# EAGLE board mtc2-n9151-breakout (EAGLE 7.5.0)
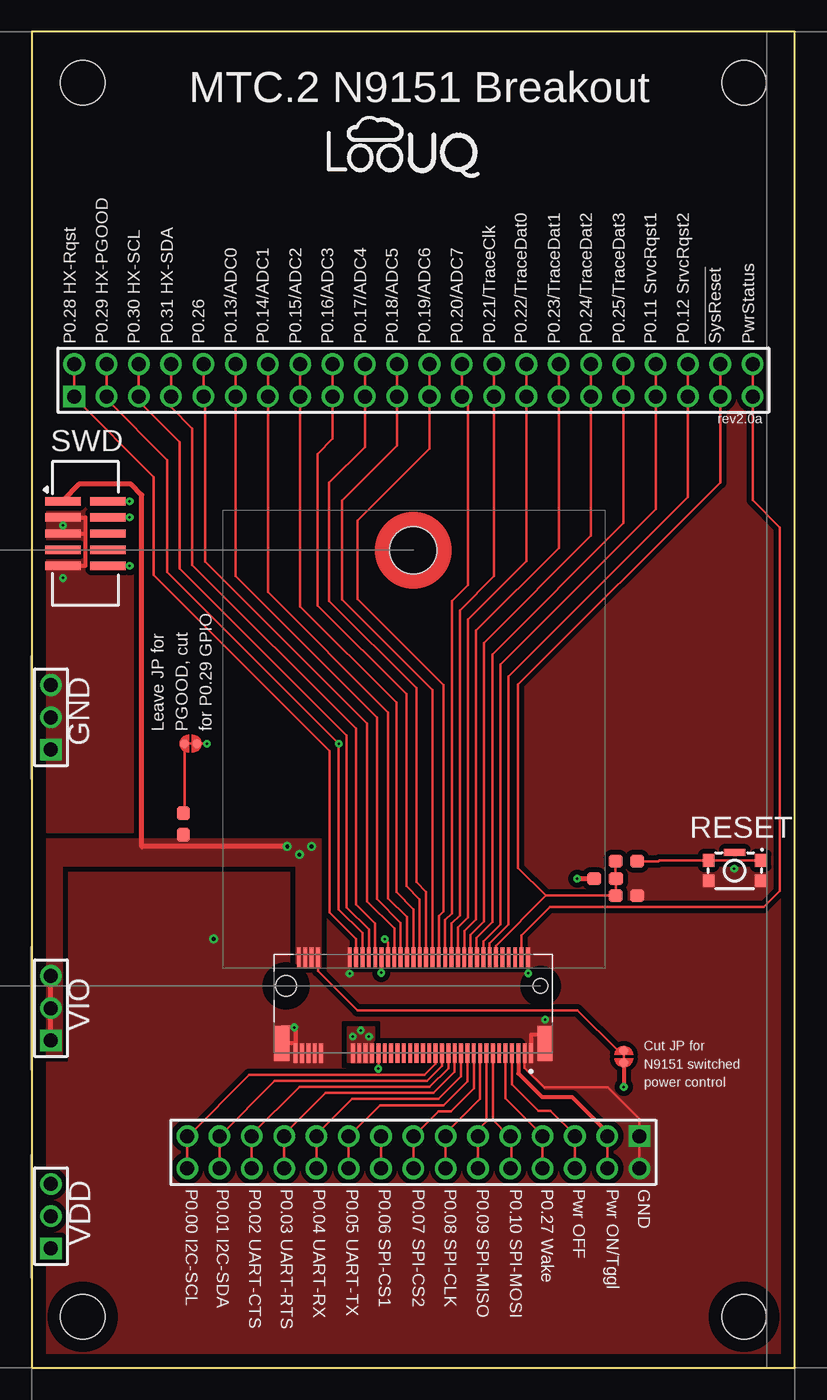
[diagram p0: board, top side]
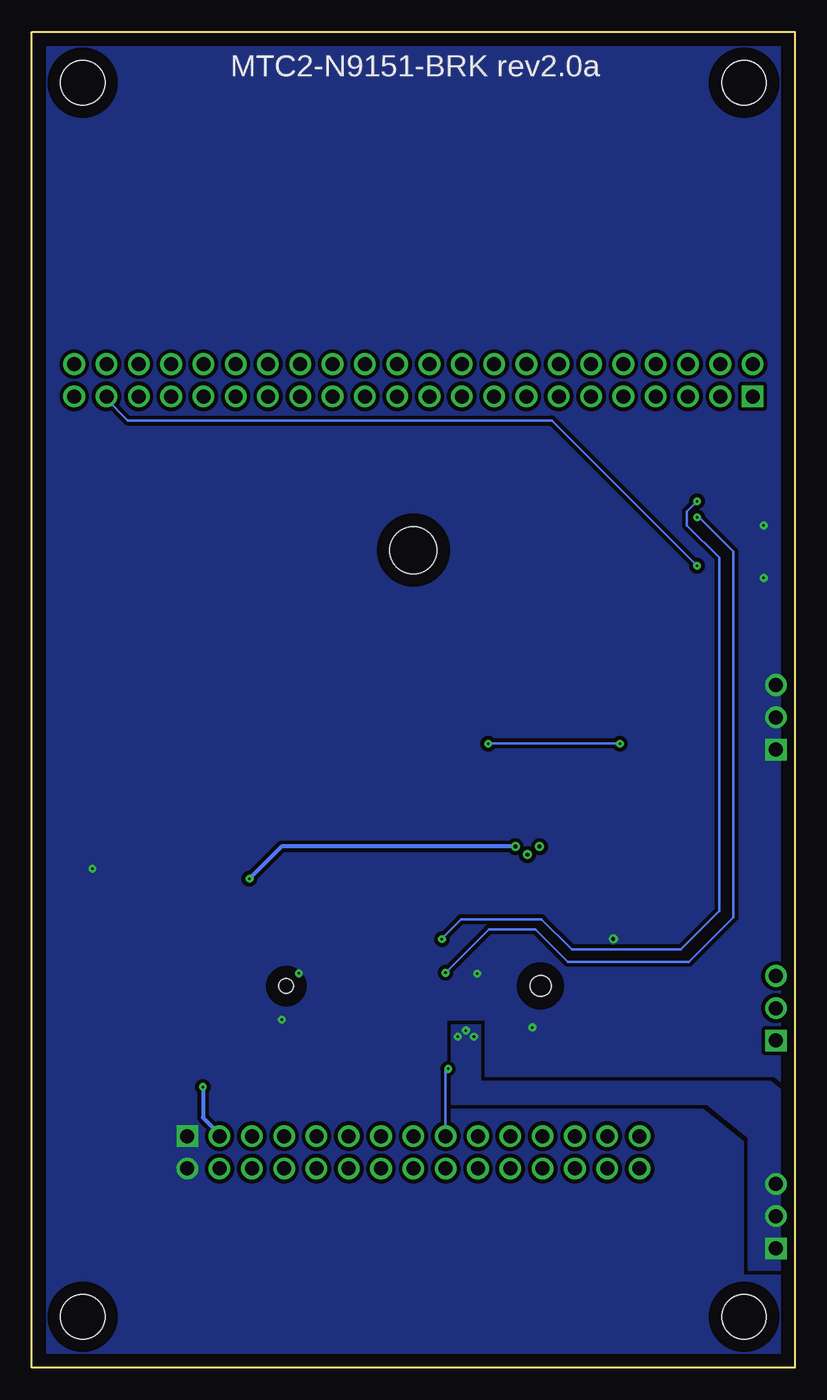
[diagram p1: board, bottom side, seen from below]

Size 60 x 105 mm. Coordinates in mm from the lower left corner, seen from the top.
Outline: 0,0 60,0 60,105 0,105 0,0
Copper layers (1*16): Top 0.035mm / dielectric 1.5mm / Bottom 0.035mm
Design rules "default *": minimum track width 10mil, minimum drill 0.61mm, track to track 8mil, track to pad 8mil, pad to pad 8mil, via to via 8mil, smd to smd 8mil, copper to edge 40mil, drill to drill 8mil, minimum pad ring 0mil, minimum via ring 8mil, stop-mask expansion 2mil, vias tented up to drill 12mil, thermal gap 10mil
Net classes: 0 Default: width 0.18 mm, clearance 0.2 mm, clearance 0.2 mm to class 1, clearance 0.2 mm to class 2, clearance 0.2 mm to class 3; 1 Power: width 0.4 mm, clearance 0.2 mm, clearance 0.2 mm to class 0, clearance 0.2 mm to class 2, clearance 0.2 mm to class 3; 2 NetClass2: width 0.3 mm, clearance 0.2 mm, clearance 0.2 mm to class 0, clearance 0.2 mm to class 1, clearance 0.2 mm to class 3; 3 Power-HI: width 0.6 mm, clearance 0.2 mm, clearance 0.2 mm to class 0, clearance 0.2 mm to class 1, clearance 0.2 mm to class 2
Holes 3.5 mm at 4,4 56,4 4,101 56,101
Holes 2 mm at 127.5,102.25 -7.25,102.5 127.5,2.5 -7.5,2.5

## Footprints (pad centres in the part's own frame; a part is rotated, then mirrored left to right if it is on the bottom)
CAP_0603 = smd 1.1 x 1: 1 -0.85,0; 2 0.85,0
Fiducial = smd 0.75 x 0.75: FID1 0,0
CnCTech_3220-10-0300-00-TR = smd 0.65 x 2.77: 1 -2.54,-1.765; 2 -2.54,1.765; 3 -1.27,-1.765; 4 -1.27,1.765; 5 0,-1.765; 6 0,1.765; 7 1.27,-1.765; 8 1.27,1.765; 9 2.54,-1.765; 10 2.54,1.765
HDR-1x3T/2.54/7x2 = drill 1.1 pad 1.7 square: 1 -2.54,0 | drill 1.1 pad 1.7: 2 0,0; 3 2.54,0
HDR-1x3T/2.54/7x2_J4 = drill 1.1 pad 1.7 square: 1 -2.54,0 | drill 1.1 pad 1.7: 2 0,0; 3 2.54,0
TE_1-2199230-6 = smd 0.3 x 1.55: 1 -9.25,5.275; 2 -9,-2.275; 3 -8.75,5.275; 4 -8.5,-2.275; 5 -8.25,5.275; 6 -8,-2.275; 7 -7.75,5.275; 8 -7.5,-2.275; 9 -7.25,5.275; 10 -7,-2.275; 11 -6.75,5.275; 12 -6.5,-2.275; 13 -6.25,5.275; 14 -6,-2.275; 15 -5.75,5.275; 16 -5.5,-2.275; 17 -5.25,5.275; 18 -5,-2.275; 19 -4.75,5.275; 20 -4.5,-2.275; 21 -4.25,5.275; 22 -4,-2.275; 23 -3.75,5.275; 24 -3.5,-2.275; 25 -3.25,5.275; 26 -3,-2.275; 27 -2.75,5.275; 28 -2.5,-2.275; 29 -2.25,5.275; 30 -2,-2.275; 31 -1.75,5.275; 32 -1.5,-2.275; 33 -1.25,5.275; 34 -1,-2.275; 35 -0.75,5.275; 36 -0.5,-2.275; 37 -0.25,5.275; 38 0,-2.275; 39 0.25,5.275; 40 0.5,-2.275; 41 0.75,5.275; 42 1,-2.275; 43 1.25,5.275; 44 1.5,-2.275; 45 1.75,5.275; 46 2,-2.275; 47 2.25,5.275; 48 2.5,-2.275; 49 2.75,5.275; 50 3,-2.275; 51 3.25,5.275; 52 3.5,-2.275; 53 3.75,5.275; 54 4,-2.275; 55 4.25,5.275; 56 4.5,-2.275; 57 4.75,5.275; 58 5,-2.275; 67 7.25,5.275; 68 7.5,-2.275; 69 7.75,5.275; 70 8,-2.275; 71 8.25,5.275; 72 8.5,-2.275; 73 8.75,5.275; 74 9,-2.275; 75 9.25,5.275 | smd 1.2 x 2.75: S1 -10.35,4.5; S2 10.35,4.5 | hole 1.15: -10,0 | hole 1.65: 10,0
HDR-2x15T/2.54x2.54/38x5 = drill 1.1 pad 1.7 square: 1 -17.78,-1.27 | drill 1.1 pad 1.7: 2 -17.78,1.27; 3 -15.24,-1.27; 4 -15.24,1.27; 5 -12.7,-1.27; 6 -12.7,1.27; 7 -10.16,-1.27; 8 -10.16,1.27; 9 -7.62,-1.27; 10 -7.62,1.27; 11 -5.08,-1.27; 12 -5.08,1.27; 13 -2.54,-1.27; 14 -2.54,1.27; 15 0,-1.27; 16 0,1.27; 17 2.54,-1.27; 18 2.54,1.27; 19 5.08,-1.27; 20 5.08,1.27; 21 7.62,-1.27; 22 7.62,1.27; 23 10.16,-1.27; 24 10.16,1.27; 25 12.7,-1.27; 26 12.7,1.27; 27 15.24,-1.27; 28 15.24,1.27; 29 17.78,-1.27; 30 17.78,1.27
HDR-2x22T/2.54x2.54/56x5 = drill 1.1 pad 1.7 square: 1 -26.67,-1.27 | drill 1.1 pad 1.7: 2 -26.67,1.27; 3 -24.13,-1.27; 4 -24.13,1.27; 5 -21.59,-1.27; 6 -21.59,1.27; 7 -19.05,-1.27; 8 -19.05,1.27; 9 -16.51,-1.27; 10 -16.51,1.27; 11 -13.97,-1.27; 12 -13.97,1.27; 13 -11.43,-1.27; 14 -11.43,1.27; 15 -8.89,-1.27; 16 -8.89,1.27; 17 -6.35,-1.27; 18 -6.35,1.27; 19 -3.81,-1.27; 20 -3.81,1.27; 21 -1.27,-1.27; 22 -1.27,1.27; 23 1.27,-1.27; 24 1.27,1.27; 25 3.81,-1.27; 26 3.81,1.27; 27 6.35,-1.27; 28 6.35,1.27; 29 8.89,-1.27; 30 8.89,1.27; 31 11.43,-1.27; 32 11.43,1.27; 33 13.97,-1.27; 34 13.97,1.27; 35 16.51,-1.27; 36 16.51,1.27; 37 19.05,-1.27; 38 19.05,1.27; 39 21.59,-1.27; 40 21.59,1.27; 41 24.13,-1.27; 42 24.13,1.27; 43 26.67,-1.27; 44 26.67,1.27
Circ-Jumper-2 = smd 0.7 x 0.7: 1 -0.479,0; 2 0.484,0
Circ-Jumper-2_JP2 = smd 0.7 x 0.7: 1 -0.479,0; 2 0.484,0
m.2_standoff = hole 3.7: 0,0
RES_0603 = smd 1.1 x 1: 1 -0.85,0; 2 0.85,0
RES_0603_R2 = smd 1.1 x 1: 1 -0.85,0; 2 0.85,0
RES_0603_R10 = smd 1.1 x 1: 1 -0.85,0; 2 0.85,0
KMR-2-wG = smd 0.9 x 1: 1@ -2.05,0.4; 1@_1 2.05,0.4; 2@ 2.05,-1.2; 2@_1 -2.05,-1.2 | smd 1.7 x 0.55: S 0,1.025

## Placement (x,y rotation side)
C1  4.7uF  [CAP_0603]  46.74,37.1 180 top
FID1  FIDUCIAL  [Fiducial]  127.5,97.5 0 top  (outside the outline)
FID2  FIDUCIAL  [Fiducial]  -7.5,97.5 0 top  (outside the outline)
FID3  FIDUCIAL  [Fiducial]  127.5,7.5 0 top  (outside the outline)
FID4  FIDUCIAL  [Fiducial]  -7.5,7.5 0 top  (outside the outline)
J1  CNCTECH 3220-10-0300-00-TR  [CnCTech_3220-10-0300-00-TR]  4.22,65.56 270 top
J2  644456-3  [HDR-1x3T/2.54/7x2]  1.5,51.12 90 top
J3  644456-3  [HDR-1x3T/2.54/7x2]  1.5,11.91 90 top
J4  644456-3  [HDR-1x3T/2.54/7x2_J4]  1.5,28.26 90 top
J5  MTC.2 1-2199230-6 (N9151)  [TE_1-2199230-6]  30,30 180 top
J6  DEV_J6  [HDR-2x15T/2.54x2.54/38x5]  30,16.93 180 top
J7  DEV_J7  [HDR-2x22T/2.54x2.54/56x5]  30,77.61 0 top
JP1  CIRCJUMPER-2  [Circ-Jumper-2]  46.55,24.45 270 top
JP2  CIRCJUMPER-2  [Circ-Jumper-2_JP2]  12.48,49.05 0 top
LG1  LOOUQ LOGO  [LooUQ-6mm]  29.19,95.91 0 top
MH1  9774025151R  [m.2_standoff]  30,64.25 90 top
R1  10K  [RES_0603]  45.07,38.44 180 top
R2  330R  [RES_0603_R2]  46.74,39.8 0 top
R10  10K  [RES_0603_R10]  11.91,42.73 270 top
SW1  KMR221GLFS  [KMR-2-wG]  55.26,39.47 0 top

## Library data of the parts
C1 = common; MANUFACTURER: Samsung; MFGPARTNM: CAP CER 4.7UF 10V X5R 0603
FID1-FID4 = common
J1 = common; MANUFACTURER: CnCTech
J2-J4 = common; DATASHEET: http://datasheets.diptrace.com/con_headers/ENG_CD_644456_D2.pdf; MANUFACTURER: TE Connectivity; MOUNT: TH
J5 = common; AVAILABILITY: In Stock; CENTERLINE_PITCH: .5 mm[.0197 in]; CHECK_PRICES: https://www.snapeda.com/parts/1-2199230-6/TE+Connectivity+AMP+Connectors/view-part/?ref=eda; COMMENT: 1-2199230-6; DESCRIPTION: 67 Position Female Connector M.2 (NGFF) Mini Card Gold 0.020 (0.50mm) Black; MANUFACTURER: TE Connectivity; MF: TE Connectivity; MP: 1-2199230-6; NUMBER_OF_POSITIONS: 67; PACKAGE: None; PRICE: None; PRODUCT_TYPE: Socket; SNAPEDA_LINK: https://www.snapeda.com/parts/1-2199230-6/TE+Connectivity+AMP+Connectors/view-part/?ref=snap
J6 = common; MOUNT: TH
J7 = common; DATASHEET: http://datasheets.diptrace.com/con_headers/877582816_sd.pdf; MOUNT: TH
JP1 JP2 = common; MOUNT: TR
LG1 = common; DESCRIPTION: LooUQ logo silk; MANUFACTURER: PCB; MOUNT: SLK
MH1 = common; DATASHEET: https://www.we-online.com/components/products/datasheet/9774025151R.pdf; MANUFACTURER: Wurth
R1 = common; MANUFACTURER: Stackpole
R2 = common; MANUFACTURER: Walsin Technology
R10 = common; DESCRIPTION: RES 10K OHM 1% 1/8W 0603; MANUFACTURER: Stackpole
SW1 = common; CLASS: Switch; DATASHEET: https://www.ckswitches.com/media/1479/kmr2.pdf; DESCRIPTION: Tactile Switch SPST-NO Top Actuated Surface Mount, GndPin, 300gf; MANUFACTURER: C&K

## Nets
ND_RESETSW: R2.2 SW1.1@ SW1.1@_1
Net_GND: C1.1 J1.3 J1.5 J1.9 J2.1 J2.2 J2.3 J5.1 J5.2 J5.3 J5.58 J5.67 J5.69 J5.71 J5.73 J5.75 J5.S1 J5.S2 J6.1 J6.2 SW1.2@ SW1.2@_1
Net_SWCLK: J1.4 J5.48
Net_SWIO: J1.2 J5.46
Net_VDD: J3.1 J3.2 J3.3 J5.51 J5.53 J5.55 J5.57
Net_VIO [NetClass2]: J1.1 J4.1 J4.2 J4.3 J5.5 J5.68 J5.70 J5.72 J5.74 J6.3 J6.4 JP1.1 JP1.2 R1.2 R10.2
nSysReset: C1.2 J1.10 J5.12 J7.41 J7.42 R1.1 R2.1
P0.00_I2C-SCL: J5.31 J6.29 J6.30
P0.01_I2C-SDA: J5.29 J6.27 J6.28
P0.02_UART-CTS: J5.27 J6.25 J6.26
P0.03_UART-RTS: J5.25 J6.23 J6.24
P0.04_UART-RX: J5.23 J6.21 J6.22
P0.05_UART-TX: J5.21 J6.19 J6.20
P0.06_SPI-CS1: J5.49 J6.17 J6.18
p0.07_SPI-CS2: J5.19 J6.15 J6.16
P0.08_SPI-CLK: J5.17 J6.13 J6.14
P0.09_SPI-MISO: J5.15 J6.11 J6.12
P0.10_SPI-MOSI: J5.13 J6.9 J6.10
P0.11_SrvcRqst1: J5.16 J7.37 J7.38
P0.12_SrvcRqst2: J5.14 J7.39 J7.40
P0.13_ADC0: J5.42 J7.11 J7.12
P0.14_ADC1: J5.40 J7.13 J7.14
P0.15_ADC2: J5.38 J7.15 J7.16
P0.16_ADC3: J5.36 J7.17 J7.18
P0.17_ADC4: J5.34 J7.19 J7.20
P0.18_ADC5: J5.32 J7.21 J7.22
P0.19_ADC6: J5.30 J7.23 J7.24
P0.20_ADC7: J5.28 J7.25 J7.26
P0.21_TraceClk: J5.26 J7.27 J7.28
P0.22_TraceD0: J5.24 J7.29 J7.30
P0.23_TraceD1: J5.22 J7.31 J7.32
P0.24_TraceD2: J5.20 J7.33 J7.34
P0.25_TraceD3: J5.18 J7.35 J7.36
P0.26: J5.44 J7.9 J7.10
P0.27_WAKE: J5.9 J6.7 J6.8
P0.28_(HX-Rqst): J5.56 J7.1 J7.2
P0.29_(HX-PGOOD): J5.54 J7.3 J7.4 JP2.1 JP2.2 R10.1
P0.30_HX-SCL: J5.52 J7.5 J7.6
P0.31_HX-SDA: J5.50 J7.7 J7.8
PwrOFF: J5.7 J6.5 J6.6
PwrStatus: J5.4 J7.43 J7.44

## Tracks (layer width: path | path; a pad name or v marks a point on that pad's centre or on a via)
ND_RESETSW
  Top 0.18: SW1.1@_1 SW1.1@ | SW1.1@ | R2.2 49.28,39.8 49.35,39.87 SW1.1@
Net_GND  (via drill 0.2 pad 0.4, 0.3 pad 0.6)
  Top 0.18: J5.3 38.75,23.55 40.29,22.02 45.31,22.02 47.78,19.54 J6.1 J6.2
  Top 0.3: J5.75 20.75,25.5 | 20.75,25.5 J5.S2 19.65,26.75 v20.64,26.75 20.75,26.75 20.75,25.5 | J1.5 4.2,65.56 | 4.2,65.56 4.2,63.02 J1.9 | J1.3 4.2,66.83 4.2,65.56 | J5.S1 40.35,25.85 40.02,26.18 39.25,26.18 J5.1
  other vias: 2.45,66.2 24.98,30.97 39.02,31 2.45,62.07 14.3,33.7 55.23,39.23 40.35,27.35
  pour Top (isolate 0.4, rank 3): 0.53,0.53 59.47,0.53 59.47,104.47 0.53,104.47
  pour Bottom (isolate 0.3, rank 2): 0.53,0.53 59.47,0.53 59.47,104.47 0.53,104.47
Net_SWCLK  (via drill 0.2 pad 0.4)
  Top 0.18: J5.48 v27.48,31.04 | J1.4 | J1.4 v7.69,66.83
  Bottom 0.18: v7.69,66.83 7.53,66.83 4.84,64.14 4.84,35.41 8.34,31.91 17.86,31.91 20.4,34.45 24.06,34.45 v27.48,31.04
Net_SWIO  (via drill 0.2 pad 0.4)
  Top 0.18: J1.2 v7.69,68.1 | v27.76,33.69 28,33.45 J5.46
  Bottom 0.18: v7.69,68.1 8.49,67.31 8.49,66.2 5.95,63.66 5.95,35.89 8.97,32.86 17.54,32.86 19.92,35.24 26.27,35.24 27.76,33.76 v27.76,33.69
Net_VDD  (via drill 0.2 pad 0.4)
  other vias: 25.24,26.03 26.51,26.03 25.87,26.51
  pour Top (isolate 0.15, rank 2, no thermals): 25.15,24.01 26.87,24 26.88,25.53 25.15,25.53
  pour Top (isolate 0.25, rank 2, no thermals): 26.93,24.02 26.93,26.77 24.81,26.77 24.81,24.02
  pour Bottom (isolate 0.25, no thermals): 24.74,26.94 27.02,26.94 27.02,20.69 6.89,20.69 3.68,18.12 3.68,7.67 0.6,7.67 0.61,21.4 1.92,22.49 24.74,22.49
Net_VIO  (via drill 0.2 pad 0.4, 0.3 pad 0.6)
  Top 0.18: J6.3 J6.4 | JP1.2 JP1.1 46.08,24.93 42.91,28.1 25.59,28.1 22.5,31.19 J5.68 | JP1.2 | JP1.2
  Top 0.3: J5.5 38.25,23.13 40.11,21.27 42.46,21.27 45.24,18.5 J6.3 | JP1.2 v46.55,22.07
  Top 0.4: J4.1 J4.2 | J4.2 | J4.2 J4.3 | J4.3 | v20.08,40.96 8.64,40.96 8.64,68.6 7.81,69.43 3.7,69.43 2.45,68.19 J1.1 | v42.88,38.44 R1.2 | R1.2
  Bottom 0.3: v46.55,22.07 46.55,19.65 45.24,18.34 J6.3 | v21.99,40.96 40.36,40.96 v42.88,38.44
  other vias: 21.04,40.32
  pour Top (isolate 0.25, rank 2, no thermals): 0.6,24.5 0.6,41.54 22.73,41.54 22.73,31.48 20.77,31.48 20.77,39.42 2.4,39.42 2.4,24.5
nSysReset  (via drill 0.2 pad 0.4)
  Top 0.18: R2.1 45.89,38.46 R1.1 45.92,37.13 C1.2 40.43,37.1 | J7.42 J7.41 54.13,69.58 38.24,53.68 38.24,39.3 40.43,37.1 | J5.12 36.5,33.17 40.43,37.1 | v7.69,63.02 J1.10 | J1.10
  Bottom 0.18: J7.41 54.13,76.12 52.46,74.45 19.12,74.45 v7.69,63.02
P0.00_I2C-SCL
  Top 0.18: J6.30 J6.29 12.27,18.2 17.1,23.02 30.88,23.02 31.75,23.89 J5.31
P0.01_I2C-SDA
  Top 0.18: J6.28 J6.27 19.1,22.54 31.06,22.54 32.25,23.73 J5.29
P0.02_UART-CTS
  Top 0.18: J6.26 J6.25 17.3,18.33 21.04,22.07 31.28,22.07 32.75,23.54 J5.27
P0.03_UART-RTS
  Top 0.18: J6.24 J6.23 19.84,18.33 23.1,21.59 31.59,21.59 33.25,23.25 J5.25
P0.04_UART-RX
  Top 0.18: J6.22 J6.21 22.38,18.33 25.16,21.11 31.97,21.11 33.75,22.89 J5.23
P0.05_UART-TX
  Top 0.18: J6.20 J6.19 27.36,20.64 32.38,20.64 34.25,22.5 J5.21
P0.06_SPI-CS1  (via drill 0.2 pad 0.4)
  Top 0.18: J6.17 J6.18 | J5.49 v27.25,23.49
  Bottom 0.18: v27.25,23.49 27.46,23.28 J6.17
p0.07_SPI-CS2
  Top 0.18: J6.16 J6.15 31.96,20.16 32.94,20.16 34.75,21.97 J5.19
P0.08_SPI-CLK
  Top 0.18: J5.17 35.25,21.12 32.54,18.41 J6.13 J6.14
P0.09_SPI-MISO
  Top 0.18: J5.15 35.75,19.34 35.08,18.67 J6.11 J6.12
P0.10_SPI-MOSI
  Top 0.18: J5.13 36.25,19.46 37.51,18.2 J6.9 37.7,18.2 37.7,15.66 J6.10
P0.11_SrvcRqst1
  Top 0.18: J5.16 35.5,33.49 36.83,34.82 36.83,55.28 49.05,67.5 J7.37 J7.38
P0.12_SrvcRqst2
  Top 0.18: J5.14 36,33.37 37.46,34.83 37.46,54.32 51.59,68.45 J7.39 J7.40
P0.13_ADC0
  Top 0.18: J7.12 J7.11 16.03,62.23 27.14,51.11 27.14,36.83 29,34.97 J5.42
P0.14_ADC1
  Top 0.18: J7.14 J7.13 18.57,60.96 28.02,51.51 28.02,36.9 29.5,35.42 J5.40
P0.15_ADC2
  Top 0.18: J7.16 J7.15 21.11,59.84 28.66,52.3 28.66,37.38 30,36.03 J5.38
P0.16_ADC3
  Top 0.18: J7.18 J7.17 23.65,73.01 22.47,71.83 22.47,59.92 29.45,52.93 29.45,37.85 30.5,36.8 J5.36
P0.17_ADC4
  Top 0.18: J7.20 J7.19 26.19,72.37 23.38,69.56 23.38,60.28 30.24,53.41 30.24,38.17 31,37.41 J5.34
P0.18_ADC5
  Top 0.18: J7.22 J7.21 28.73,72.47 24.4,68.14 24.4,60.36 31.5,53.27 J5.32
P0.19_ADC6
  Top 0.18: J7.24 J7.23 31.27,72.24 25.62,66.58 25.62,60.42 32.38,53.65 32.38,35.87 32,35.49 J5.30
P0.20_ADC7
  Top 0.18: J7.26 J7.25 34.29,75.87 34.29,61.51 33.02,60.24 33.02,35.72 32.5,35.2 J5.28
P0.21_TraceClk
  Top 0.18: J7.28 J7.27 36.35,62.21 33.65,59.51 33.65,35.56 33,34.91 J5.26
P0.22_TraceD0
  Top 0.18: J7.30 J7.29 38.89,63.42 34.29,58.82 34.29,35.4 33.5,34.61 J5.24
P0.23_TraceD1
  Top 0.18: J7.32 J7.31 41.43,64.44 34.92,57.93 34.92,35.24 34,34.32 J5.22
P0.24_TraceD2
  Top 0.18: J7.34 J7.33 43.97,65.39 35.56,56.97 35.56,35.08 34.5,34.02 J5.20
P0.25_TraceD3
  Top 0.18: J7.35 J7.36 J7.35 | J7.35 46.51,66.37 36.21,56.07 36.21,35.02 34.95,33.77 34.95,32.32 J5.18
P0.26
  Top 0.18: J7.10 J7.9 13.62,76.34 13.62,63.36 26.35,50.64 26.35,36.67 28.5,34.52 J5.44
P0.27_WAKE
  Top 0.18: J5.9 37.25,21.18 40.16,18.27 J6.7 J6.8
P0.28_(HX-Rqst)
  Top 0.18: J7.2 J7.1 3.33,76.28 9.6,70.01 9.6,62.31 23.42,48.49 23.42,35.79 25.5,33.71 J5.56
P0.29_(HX-PGOOD)  (via drill 0.2 pad 0.4)
  Top 0.18: JP2.1 12,43.67 R10.1 | J7.4 J7.3 5.87,76.12 10.65,71.33 10.65,62.52 v24.13,49.05 24.13,36.03 26,34.16 J5.54 | v13.76,49.03 13.74,49.05 JP2.2 JP2.1 | JP2.1
  Bottom 0.18: v13.76,49.03 13.78,49.05 v24.13,49.05
P0.30_HX-SCL
  Top 0.18: J7.6 J7.5 8.41,75.96 11.62,72.75 11.62,62.83 24.76,49.69 24.76,36.19 26.5,34.45 J5.52
P0.31_HX-SDA
  Top 0.18: J7.8 J7.7 10.95,75.49 12.62,73.82 12.62,63.1 25.48,50.24 25.48,36.42 27,34.91 J5.50
PwrOFF
  Top 0.18: J6.6 J6.5 42.7,18.29 40.79,20.2 39.83,20.2 37.75,22.28 J5.7
PwrStatus
  Top 0.18: J7.44 J7.43 56.67,68.19 58.82,66.04 58.82,37.47 57.55,36.2 40.73,36.2 38.5,33.97 J5.4

## Text on the board
tPlace: MTC.2 N9151 Breakout | P0.28 HX-Rqst | P0.29 HX-PGOOD | P0.30 HX-SCL | P0.31 HX-SDA | P0.26 | P0.13/ADC0 | P0.14/ADC1 | P0.15/ADC2 | P0.16/ADC3 | P0.17/ADC4 | P0.18/ADC5 | P0.19/ADC6 | P0.20/ADC7 | P0.21/TraceClk | P0.22/TraceDat0 | P0.23/TraceDat1 | P0.24/TraceDat2 | P0.25/TraceDat3 | P0.11 SrvcRqst1 | P0.12 SrvcRqst2 | !SysReset | PwrStatus | rev2.0a | SWD | Leave JP for / PGOOD, cut / for P0.29 GPIO | GND | RESET | VIO | Cut JP for / N9151 switched / power control | P0.00 I2C-SCL | P0.01 I2C-SDA | P0.02 UART-CTS | P0.03 UART-RTS | P0.04 UART-RX | P0.05 UART-TX | P0.06 SPI-CS1 | P0.07 SPI-CS2 | P0.08 SPI-CLK | P0.09 SPI-MISO | P0.10 SPI-MOSI | P0.27 Wake | Pwr OFF | Pwr ON/Tggl | GND | VDD
bPlace: LooUQ MTC2-N9151-UXplor rev1.8a | MTC2-N9151-BRK rev2.0a
tDocu: J7 | J1 | MH1 | J2 | Edge stop in / TE conn. is / 1.75mm below / center of alignment / holes. | JP2 | R10 | R2 | SW1 | R1 | C1 | J5 | J4 | JP1 | J6 | J3